# Altium PCB PCB_dht11.PcbDoc
Units mm, origin at the board's own origin, x right, y up, seen from the top; angles counter-clockwise.
Board outline 35.05 x 27.18 mm, 2 copper layers (Top Layer, Bottom Layer); 8 components, 12 nets, 44 pads, 12 vias.
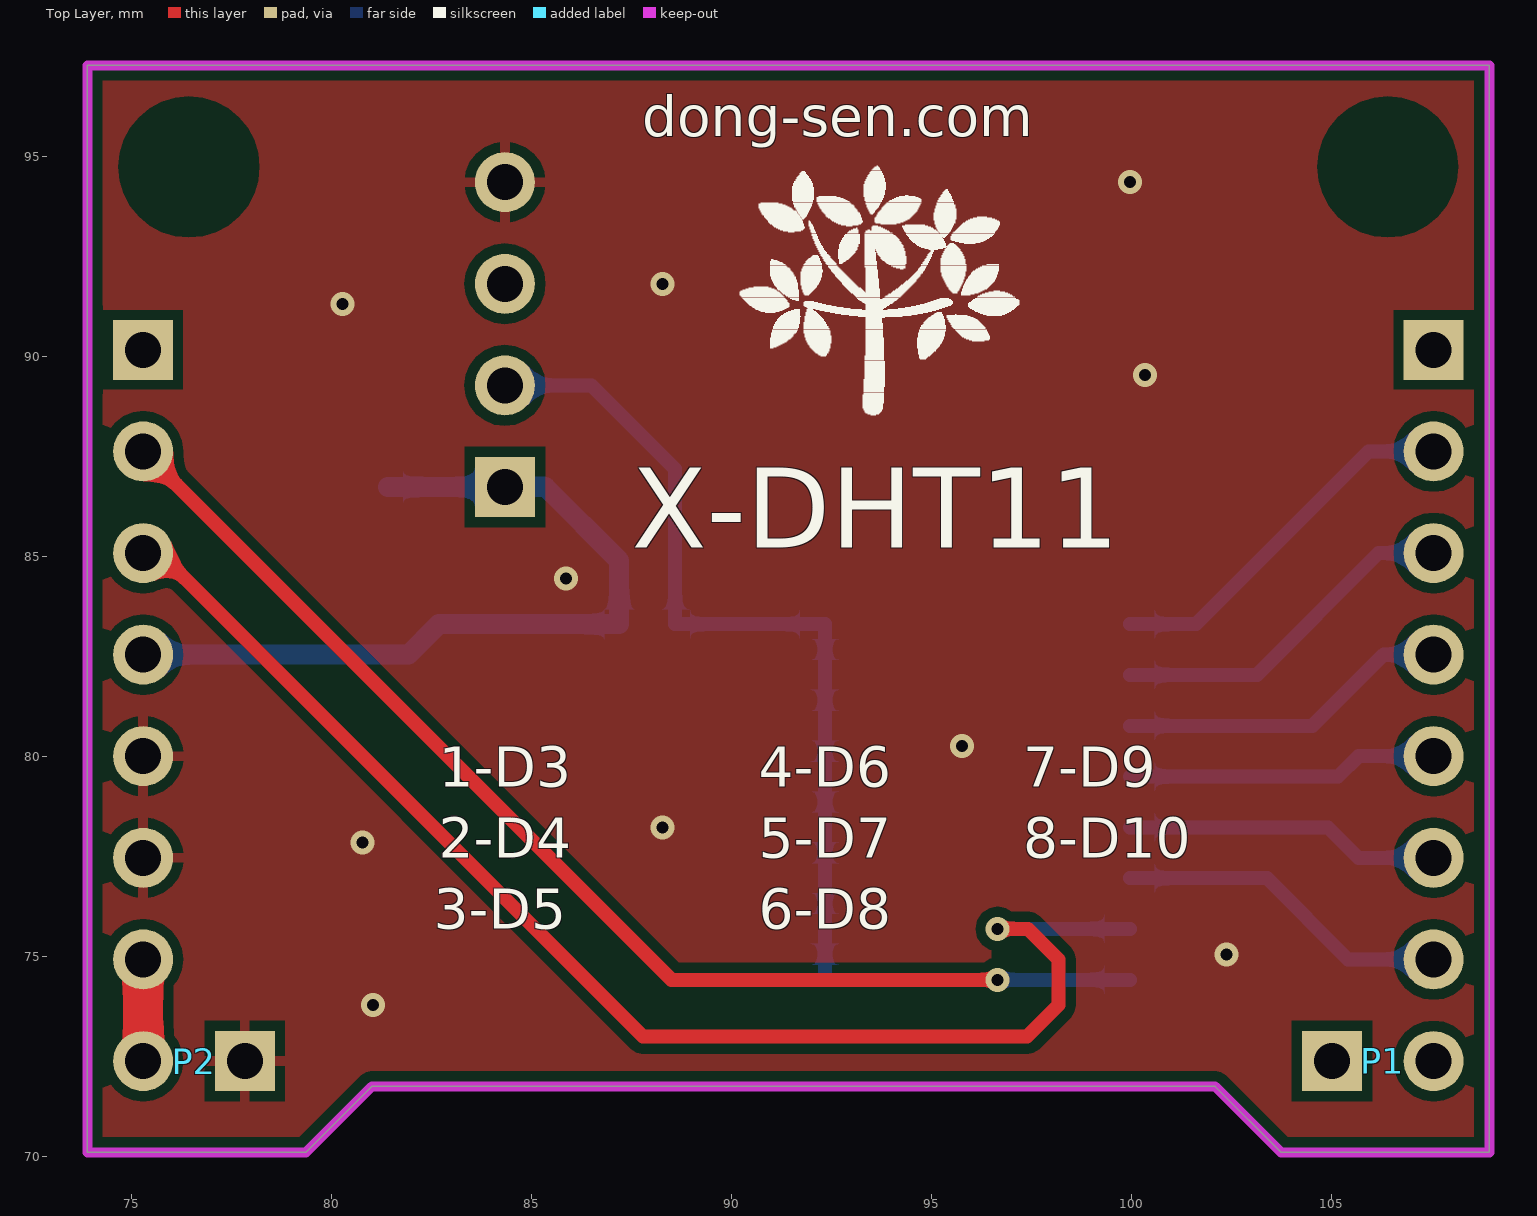
[diagram p0: Top Layer view]
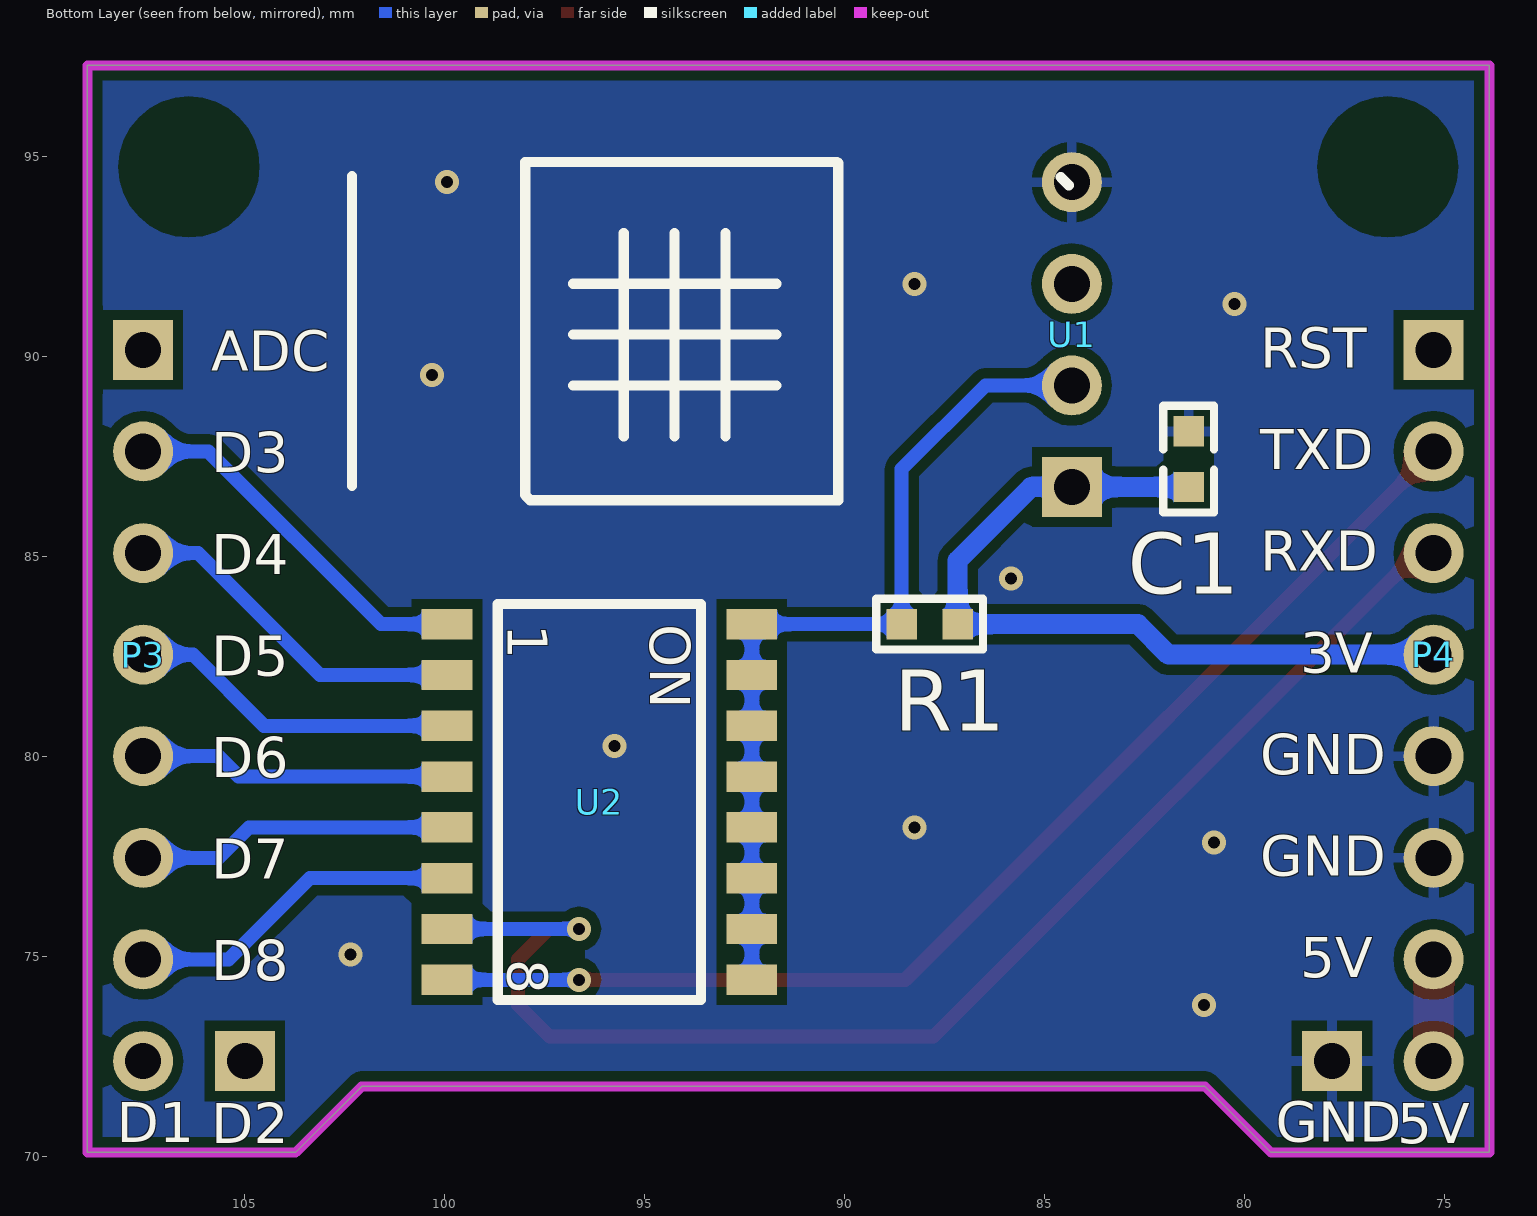
[diagram p1: Bottom Layer view, seen from below]

## Layer stack, top to bottom
Top Solder: solder mask 0.0102, Solder Resist, Dk 3.5
Top Layer: signal copper 0.0356
Dielectric 1: dielectric 0.32, FR-4, Dk 4.8
Bottom Layer: signal copper 0.0356
Bottom Solder: solder mask 0.0102, Solder Resist, Dk 3.5

## Board outline
73.889,70.104 73.889,97.282 108.941,97.282 108.941,70.104 103.734,70.104 102.083,71.755 81.001,71.755 79.35,70.104

## Design rules (kind name [scope] priority, off if disabled: settings)
Clearance [All] p1: gap=0.254
PolygonConnect PolygonConnect_via [IsVia] p1: connectstyle=Direct reliefconductorwidth=0.254 reliefentries=4 polygonreliefangle="90 Angle" airgapwidth=0.254
PolygonConnect [All] p2: connectstyle=Relief reliefconductorwidth=0.254 reliefentries=4 polygonreliefangle="90 Angle" airgapwidth=0.254
RoutingVias [All] p1: holewidth=0.711 width=1.27 viastyle="Through Hole" minholewidth=0.711 minwidth=1.27 maxholewidth=0.711 maxwidth=1.27
SolderMaskExpansion [All] p1: expansion=0.102
Width [All] p1: maxlimit=1 minlimit=0.254 preferedwidth=0.254
30 further rules are at their usual default settings.

## Classes and differential pairs
component class Sheet_dht11: C1 P1 P2 P3 P4 R1 U1

## Components (designator, comment, footprint, x,y, rotation, side; value= is the part's Value field where it differs from the comment)
C1 "100nF" C0603 81.229,86.716 r90 bottom
P1 "Header 2" HDR1X2 105.004,72.39 r0 top
P2 "Header 2" HDR1X2 77.826,72.39 r180 top
P3 "Header 7" HDR1X7 107.544,90.17 r270 bottom
P4 "Header 7" HDR1X7 75.286,90.17 r270 bottom
R1 "5K" R0603 87.884,83.312 r0 bottom
U1 "dht11" dht11 84.328,86.741 r90 bottom
U2 "1.27mmSwitch" NumberSwitch 99.949,83.312 r270 bottom

## Footprints (in the part's own frame and the unit in brackets; to place one, negate y for a bottom-side part, rotate by r counter-clockwise, add the part's x,y. Pads: shape width x height; smd on the part's side, far side on the other; paste and mask are expansions set on the pad)
C0603 [mil]
  rect 30x30 smd: 1(1,7) 2(56,7)
  silkscreen extent -24,-18 81,32
dht11 [mm]
  rect 1.5x1.5 hole 0.9: 1(0,0)
  round 1.5 hole 0.9: 2(2.54,0) 3(5.08,0) 4(7.62,0)
  silkscreen extent -0.33,0.08 8.13,18
HDR1X2 [mm] "Connector; Header; 2 Position"
  rect 1.5x1.5 hole 0.9: 1(0,0)
  round 1.5 hole 0.9: 2(2.54,0)
HDR1X7 [mm] "Connector; Header; 7 Position"
  rect 1.5x1.5 hole 0.9: 1(0,0)
  round 1.5 hole 0.9: 2(2.54,0) 3(5.08,0) 4(7.62,0) 5(10.16,0) 6(12.7,0) 7(15.24,0)
NumberSwitch [mm]
  rect 0.76x1.27 smd: 1(0,0) 2(1.27,0) 3(2.54,0) 4(3.81,0) 5(5.08,0) 6(6.35,0) 7(7.62,0) 8(8.89,0) 9(8.89,7.62) 10(7.62,7.62) 11(6.35,7.62) 12(5.08,7.62) 13(3.81,7.62) 14(2.54,7.62) 15(1.27,7.62) 16(0,7.62)
  silkscreen extent -0.51,1.27 9.4,6.35
R0603 [mil]
  rect 30x30 smd: 1(-27.5,0) 2(27.5,0)
  silkscreen extent -52,-25 52,25

## Part data
C1: library part C0603, "贴片电容"
P1 P2: "Header, 2-Pin"
P3 P4: "Header, 7-Pin"
R1: library part R0603, "贴片电阻"
U1: "温湿度传感器"
U2: library part NumberSwitch, "拨码开关"

## Free pads (board coordinates)
  round 3 on Keep-Out: ""(76.429,94.742) ""(106.401,94.742)

## Via types
v1: diameter 0.6, hole 0.3, Top Layer to Bottom Layer, tented both sides, 12 vias

## Nets (pads, with @x,y where several pads share a name; then routed paths per layer and width w, separated by ;. In a path a pad name is that pad's centre, name@x,y a point inside that pad or via, vN(x,y) a via of type N, cw(c..) or ccw(c..) an arc to the next point about the centre after c; other vN are vias at no path point)
GND: C1.2 P2.1 P4.5 P4.6 U1.4
  other v1: 81.026,73.787 102.362,75.057 80.772,77.851 88.265,78.232 95.758,80.264 85.852,84.455 100.33,89.535 80.264,91.313 88.265,91.821 99.949,94.361
GPIO0: P3.2 U2.1 | length 9.4
  Bottom Layer w0.35: U2.1 101.6,83.312 105.918,87.63 P3.2
GPIO1: P4.2 U2.8 | length 30.1
  Top Layer w0.35: P4.2 88.494,74.422 v1(96.647,74.422)
  Bottom Layer w0.35: v1(96.647,74.422) U2.8
GPIO2: P3.3 U2.2 | length 8.9
  Bottom Layer w0.35: U2.2 103.124,82.042 106.172,85.09 P3.3
GPIO3: P4.3 U2.7 | length 34.5
  Top Layer w0.35: P4.3 75.692,85.09 87.782,73 97.384,73 98.171,73.787 98.171,74.93 97.409,75.692 v1(96.647,75.692)
  Bottom Layer w0.35: v1(96.647,75.692) U2.7
GPIO12: P3.5 U2.4 | length 7.8
  Bottom Layer w0.35: U2.4 105.156,79.502 105.664,80.01 P3.5
GPIO13: P3.6 U2.5 | length 7.9
  Bottom Layer w0.35: U2.5 104.902,78.232 105.664,77.47 P3.6
GPIO14: P3.4 U2.3 | length 8.3
  Bottom Layer w0.35: U2.3 104.521,80.772 106.299,82.55 P3.4
GPIO15: P3.7 U2.6 | length 8.4
  Bottom Layer w0.35: U2.6 103.378,76.962 105.41,74.93 P3.7
NetR1_2: R1.2 U1.2 U2.9 U2.10 U2.11 U2.12 U2.13 U2.14 U2.15 U2.16 | length 21.6
  Bottom Layer w0.35: U1.2 86.487,89.281 88.582,87.185 R1.2 U2.16 U2.15 U2.14 U2.13 U2.12 U2.11 U2.10 U2.9
VCC: C1.1 P4.4 R1.1 U1.1 | length 20.3
  Bottom Layer w0.5: P4.4 81.915,82.55 82.677,83.312 R1.1 87.185,84.9 85.344,86.741 U1.1 C1.1
VCC_5V: P2.2 P4.7 | length 2.5
  Top Layer w1: P2.2 P4.7
pads on no net: P1.1 P1.2 P3.1 P4.1 U1.3

## Polygon pours and split planes (outlines as drawn)
GND on Top Layer "Top Layer-No Net" (solid, remove dead copper, pour order 26): 73.406,97.917 109.855,97.917 109.982,98.044 111.379,96.647 111.379,69.215 73.279,69.215 73.152,69.088
GND on Bottom Layer "Top Layer-No Net" (solid, remove dead copper, pour order 28): 71.247,98.425 71.374,98.298 114.046,98.298 114.046,68.453 113.411,67.818 72.009,67.818

## Keep-outs
Keep-Out Layer:
  the board outline again, w0.254

## Silkscreen, mask and mechanical layers (free items; w line width, h text height)
Top Overlay:
  drawing of 1036 lines, arcs and shapes, not listed
  text "dong-sen.com" at 87.757,95.504 h1
  text "X-DHT11" at 87.503,85.217 h2
  text "1-D3" at 82.677,79.248 h1
  text "4-D6" at 90.678,79.248 h1
  text "7-D9" at 97.282,79.248 h1
  text "2-D4" at 82.677,77.47 h1
  text "5-D7" at 90.678,77.47 h1
  text "8-D10" at 97.282,77.47 h1
  text "3-D5" at 82.55,75.692 h1
  text "6-D8" at 90.678,75.692 h1
Bottom Overlay:
  text "RST" at 79.616,89.721 h1
  text "ADC" at 105.842,89.645 h1
  text "TXD" at 79.616,87.181 h1
  text "D3" at 105.842,87.105 h1
  text "RXD" at 79.616,84.641 h1
  text "D4" at 105.842,84.565 h1
  text "3V" at 78.616,82.101 h1
  text "D5" at 105.842,82.025 h1
  text "GND" at 79.616,79.561 h1
  text "D6" at 105.842,79.485 h1
  text "GND" at 79.616,77.021 h1
  text "D7" at 105.842,76.945 h1
  text "5V" at 78.616,74.481 h1
  text "D8" at 105.842,74.405 h1
  text "GND" at 79.235,70.366 h1
  text "D1" at 108.204,70.358 h1
  text "5V" at 76.195,70.341 h1
  text "D2" at 105.842,70.333 h1

## Text inside footprints (layer, text, board x,y; h text height)
U2: Bottom Overlay "8" at 98.425,74.93 h1 r90; Bottom Overlay "1" at 98.425,83.312 h1 r90; Bottom Overlay "ON" at 94.869,83.312 h1 r90